# EAGLE board Prelim (EAGLE 9.0.1)
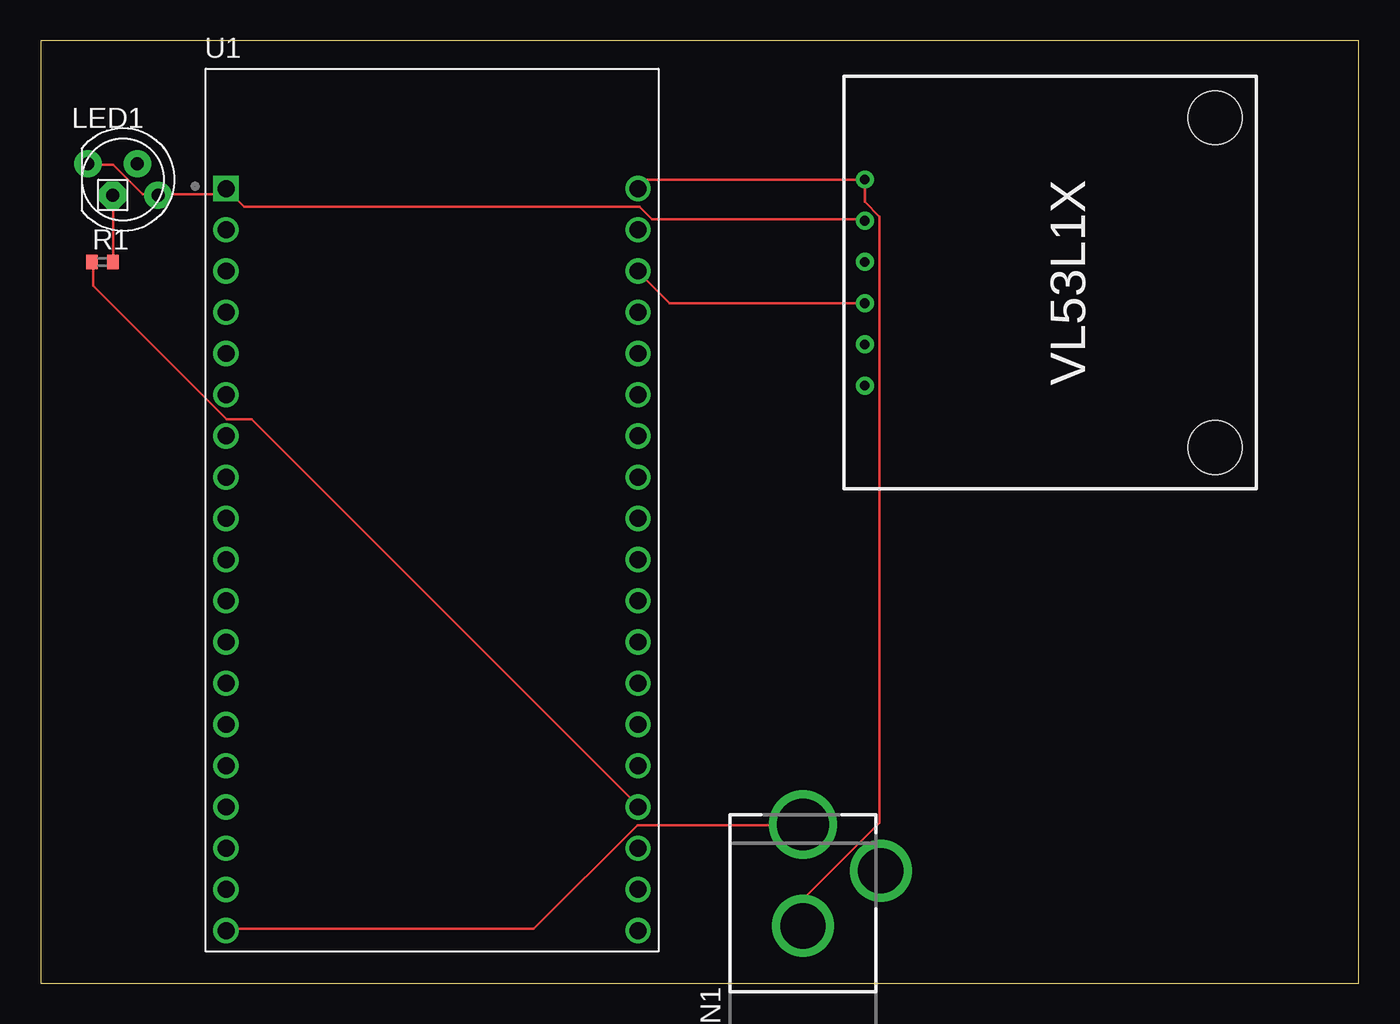
[diagram p0: board, top side]
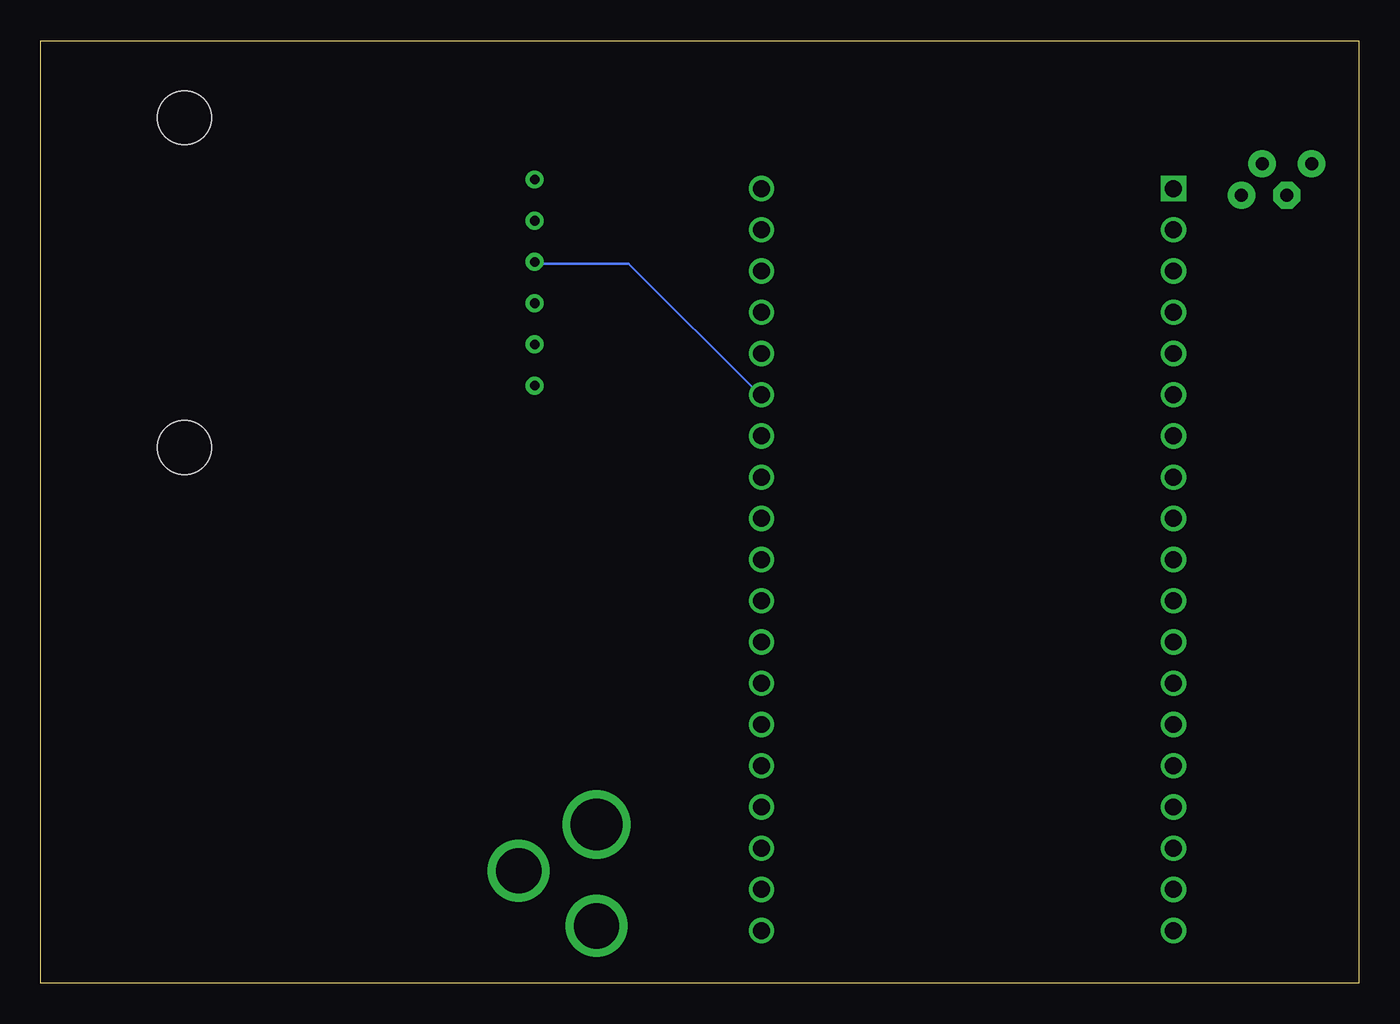
[diagram p1: board, bottom side, seen from below]

Size 81.26 x 58.09 mm. Coordinates in mm from the lower left corner, seen from the top.
Outline: 0,0 81.26,0 81.26,58.09 0,58.09 0,0
Copper layers (1*16): Top 0.035mm / dielectric 1.5mm / Bottom 0.035mm
Design rules "default": minimum track width 6mil, minimum drill 0.35mm, track to track 6mil, track to pad 6mil, pad to pad 6mil, via to via 6mil, smd to smd 6mil, copper to edge 40mil, drill to drill 6mil, minimum pad ring 10mil, minimum via ring 8mil, stop-mask expansion 4mil, vias tented up to drill 0mil, thermal gap 10mil

## Footprints (pad centres in the part's own frame; a part is rotated, then mirrored left to right if it is on the bottom)
DCJACK_2MM_PTH = drill 2.8: GND 0,7.35; GNDBREAK 4.8,10.75 | drill 3.2: PWR 0,13.6
LED5MMRGB = drill 0.8 pad 1.676: 1 -2.159,0.968; 3 0.889,0.968; 4 2.159,-0.968 | drill 0.8 pad 1.676 octagon: 2 -0.635,-0.968
R0402 = smd 0.7 x 0.9: 1 -0.65,0; 2 0.65,0
MODULE_ESP32-DEVKITC-32D = drill 1.04 square: 1 -12.7,19.76 | drill 1.04: 2 -12.7,17.22; 3 -12.7,14.68; 4 -12.7,12.14; 5 -12.7,9.6; 6 -12.7,7.06; 7 -12.7,4.52; 8 -12.7,1.98; 9 -12.7,-0.56; 10 -12.7,-3.1; 11 -12.7,-5.64; 12 -12.7,-8.18; 13 -12.7,-10.72; 14 -12.7,-13.26; 15 -12.7,-15.8; 16 -12.7,-18.34; 17 -12.7,-20.88; 18 -12.7,-23.42; 19 -12.7,-25.96; 20 12.7,19.76; 21 12.7,17.22; 22 12.7,14.68; 23 12.7,12.14; 24 12.7,9.6; 25 12.7,7.06; 26 12.7,4.52; 27 12.7,1.98; 28 12.7,-0.56; 29 12.7,-3.1; 30 12.7,-5.64; 31 12.7,-8.18; 32 12.7,-10.72; 33 12.7,-13.26; 34 12.7,-15.8; 35 12.7,-18.34; 36 12.7,-20.88; 37 12.7,-23.42; 38 12.7,-25.96
QWIIC_DISTANCE_SENSOR_VL53L1X = drill 0.6: P$1 6.35,1.27; P$2 8.89,1.27; P$3 11.43,1.27; P$4 13.97,1.27; P$5 16.51,1.27; P$6 19.05,1.27 | hole 3.302: 2.54,22.86; 22.86,22.86

## Placement (x,y rotation side)
CN1  [DCJACK_2MM_PTH]  46.99,-3.81 0 top
LED1  RGBLED_CA-5MM  [LED5MMRGB]  5.08,49.53 0 top
R1  10k  [R0402]  3.81,44.45 0 top
U1  ESP32-DEVKITC-32D  [MODULE_ESP32-DEVKITC-32D]  24.13,29.21 0 top
U$1  QWIIC_STIANCE_SENSOR_VL53L1X  [QWIIC_DISTANCE_SENSOR_VL53L1X]  49.53,55.88 270 top

## Library data of the parts
CN1 LED1 = adafruit
R1 = audio amplifier example
U1 = ESP32-DEVKITC-32D; AVAILABILITY: Unavailable; DESCRIPTION: - Transceiver; 802.11 b/g/n _Wi-Fi, WiFi, WLAN_, Bluetooth® Smart Ready 4.x Dual Mode For Use With ESP-WROOM-32; MF: Espressif Systems; MP: ESP32-DEVKITC-32D; PACKAGE: None; PRICE: None
U$1 = Qwiic_Distance_Sensor_VL53L1X

## Nets
+3V3: LED1.1 LED1.4 U1.1 U$1.P$2
GND: CN1.GND U1.20 U$1.P$1
GND1: U1.14
GND2: U1.26
GNDBREAK: CN1.GNDBREAK
N$1: U1.25 U$1.P$3
N$2: U1.22 U$1.P$4
N$3: R1.1 U1.35
N$4: LED1.2 R1.2
N$5: CN1.PWR U1.19

## Tracks (layer width: path | path; a pad name or v marks a point on that pad's centre or on a via)
+3V3
  Top 0.152: U$1.P$2 50.8,47.09 37.69,47.09 36.93,47.85 12.55,47.85 11.48,48.92 U1.1 11.33,48.92 11.02,48.62 7.37,48.62 LED1.4 7.21,48.62 6.3,48.62 4.47,50.44 2.95,50.44 LED1.1
GND
  Top 0.152: U1.20 36.93,49.07 37.39,49.53 U$1.P$1 50.8,48.16 51.71,47.24 51.71,9.91 46.99,5.18 CN1.GND
N$1
  Bottom 0.152: U$1.P$3 50.8,44.35 45.01,44.35 36.93,36.27 U1.25
N$2
  Top 0.152: U$1.P$4 38.76,41.91 36.93,43.74 U1.22
N$3
  Top 0.152: R1.1 3.25,44.35 3.25,42.98 11.48,34.75 13.01,34.75 36.78,10.97 U1.35
N$4
  Top 0.152: R1.2 4.47,44.5 4.47,48.46 LED1.2
N$5
  Top 0.152: U1.19 11.48,3.35 30.38,3.35 36.78,9.75 46.99,9.75 CN1.PWR